# EAGLE board 14062-gatorBytes_Sensor_board-Panel (EAGLE 9.0.1)
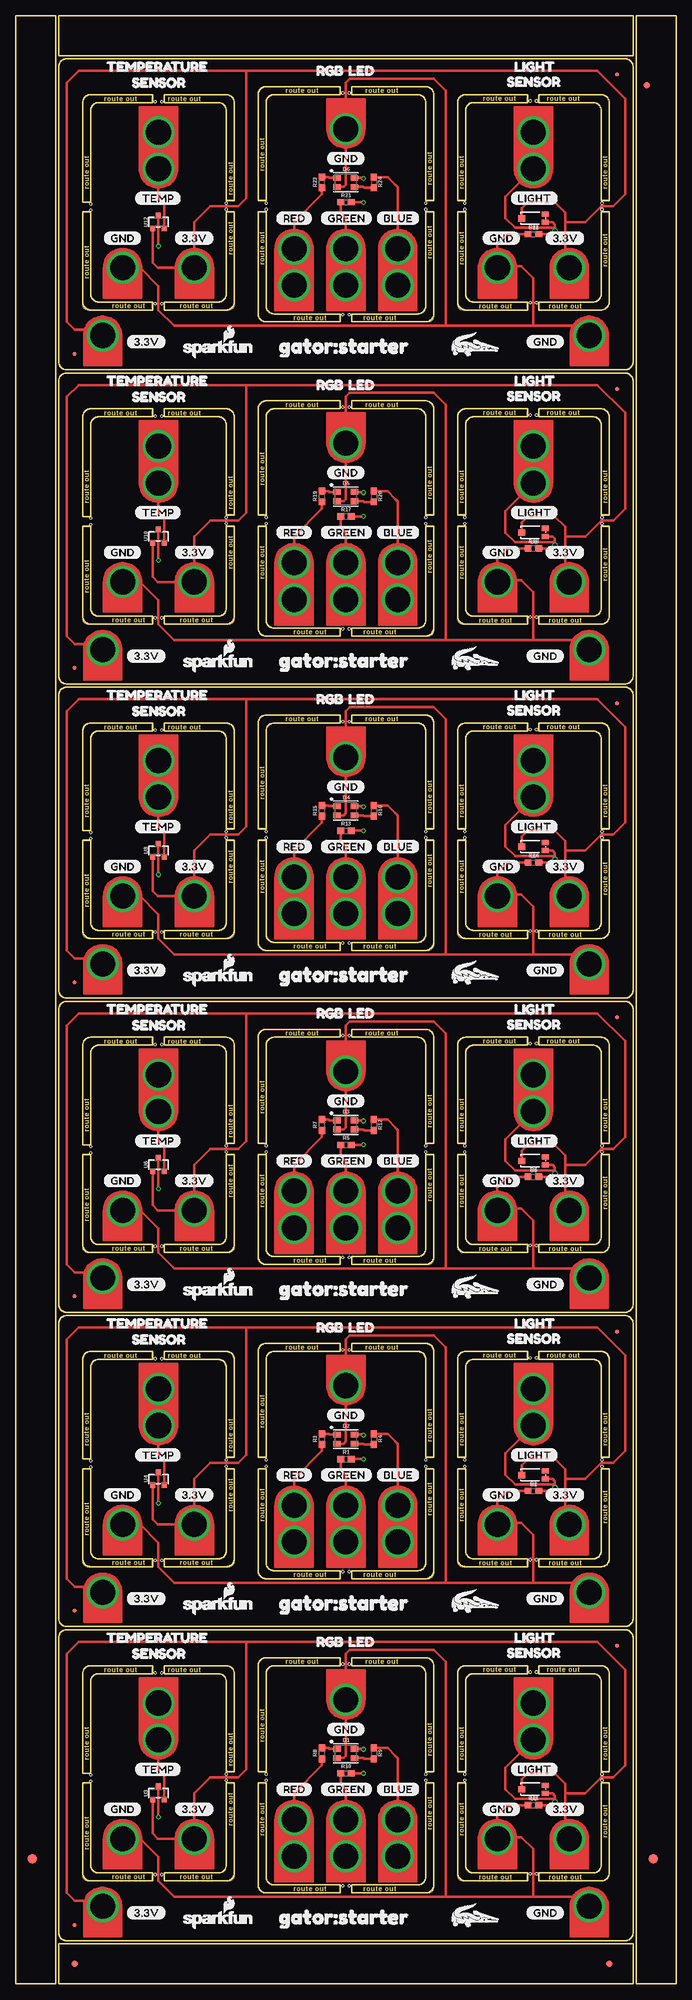
[diagram p0: board, top side]
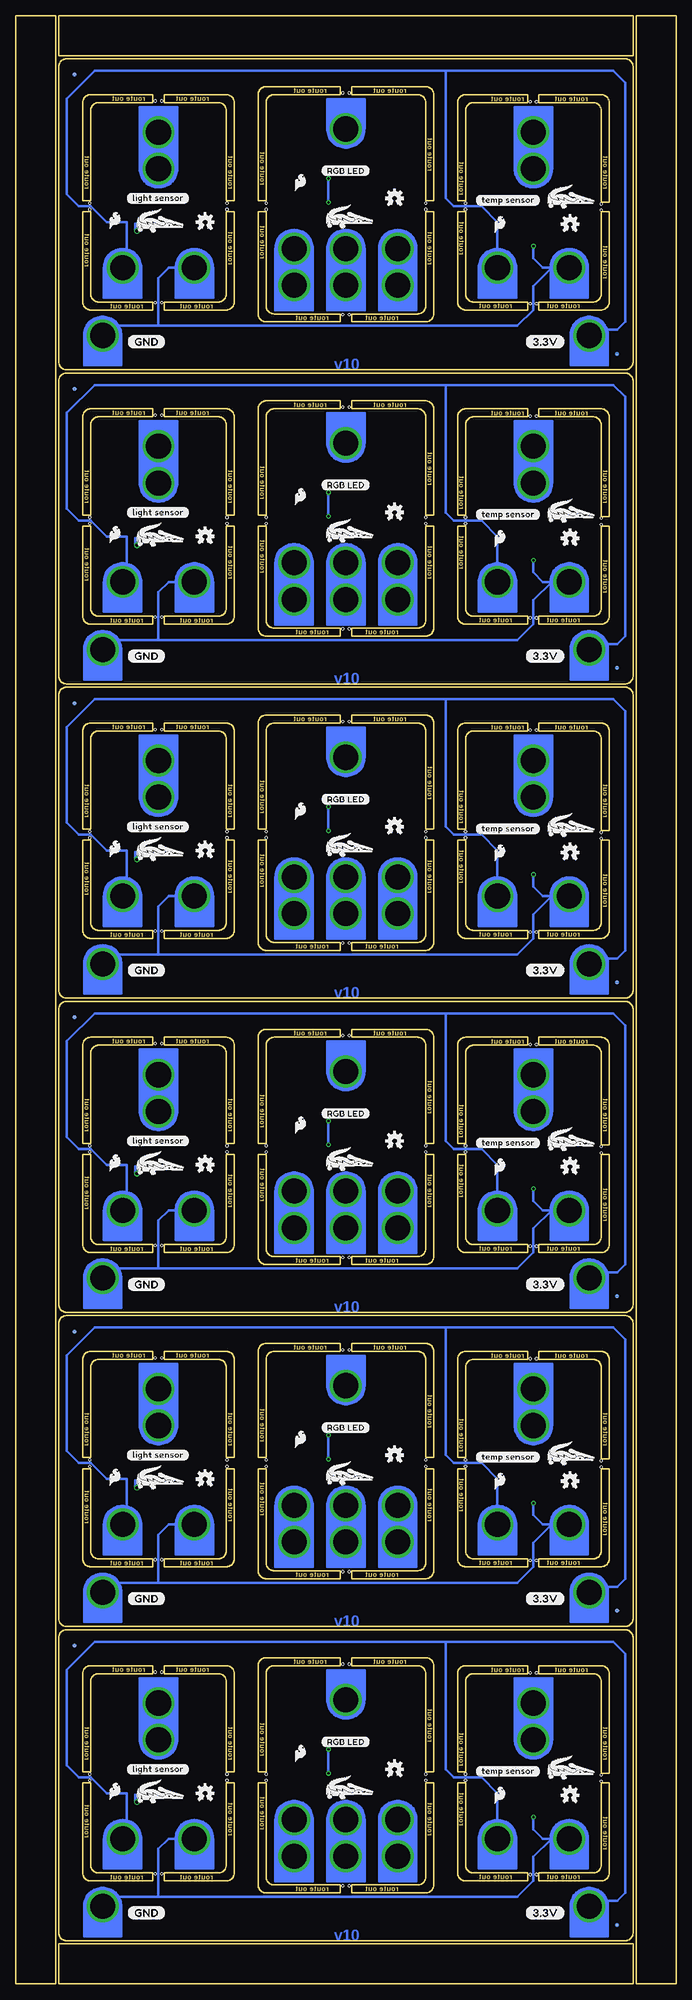
[diagram p1: board, bottom side, seen from below]

Size 105.16 x 313.44 mm. Coordinates in mm from the lower left corner, seen from the top.
Outline: 648 segments
Copper layers (1*16): Top 0.035mm / dielectric 1.5mm / Bottom 0.035mm
Design rules "SparkFun-2-layer-TIGHT": minimum track width 7mil, minimum drill 15mil, track to track 7mil, track to pad 7mil, pad to pad 7mil, via to via 7mil, smd to smd 7mil, copper to edge 7mil, drill to drill 7mil, minimum pad ring 7mil, minimum via ring 7mil, stop-mask expansion 4mil, vias tented up to drill 25mil, thermal gap 10mil
Holes 0.38 mm at 11.94,33.27 11.94,32.26 33.53,33.4 33.53,32.38 39.88,33.4 39.88,32.38 22.23,49.53 23.24,49.53 22.23,17.4 23.24,17.4 52.07,50.93 53.09,50.93 65.28,32.38 65.28,33.4 52.07,15.62 53.09,15.62 81.92,17.53 82.93,17.53 71.5,32.38 71.5,33.4 81.92,49.66 82.93,49.66 93.34,33.4 93.34,32.38 11.94,83.31 11.94,82.3 33.53,83.44 33.53,82.42 39.88,83.44 39.88,82.42 22.23,99.57 23.24,99.57 22.23,67.44 23.24,67.44 52.07,100.97 53.09,100.97 65.28,82.42 65.28,83.44 52.07,65.66 53.09,65.66 81.92,67.56 82.93,67.56 71.5,82.42 71.5,83.44 81.92,99.7 82.93,99.7 93.34,83.44 93.34,82.42 11.94,133.35 11.94,132.33 33.53,133.48 33.53,132.46 39.88,133.48 39.88,132.46 22.23,149.61 23.24,149.61 22.23,117.48 23.24,117.48 52.07,151 53.09,151 65.28,132.46 65.28,133.48 52.07,115.7 53.09,115.7 81.92,117.6 82.93,117.6 71.5,132.46 71.5,133.48 81.92,149.73 82.93,149.73 93.34,133.48 93.34,132.46 11.94,183.39 11.94,182.37 33.53,183.52 33.53,182.5 39.88,183.52 39.88,182.5 22.23,199.64 23.24,199.64 22.23,167.51 23.24,167.51 52.07,201.04 53.09,201.04 65.28,182.5 65.28,183.52 52.07,165.74 53.09,165.74 81.92,167.64 82.93,167.64 71.5,182.5 71.5,183.52 81.92,199.77 82.93,199.77 93.34,183.52 93.34,182.5 11.94,233.43 11.94,232.41 33.53,233.55 33.53,232.54 39.88,233.55 39.88,232.54 22.23,249.68 23.24,249.68 22.23,217.55 23.24,217.55 52.07,251.08 53.09,251.08 65.28,232.54 65.28,233.55 52.07,215.77 53.09,215.77 81.92,217.68 82.93,217.68 71.5,232.54 71.5,233.55 81.92,249.81 82.93,249.81 93.34,233.55 93.34,232.54 11.94,283.46 11.94,282.45 33.53,283.59 33.53,282.57 39.88,283.59 39.88,282.57 22.23,299.72 23.24,299.72 22.23,267.59 23.24,267.59 52.07,301.12 53.09,301.12 65.28,282.57 65.28,283.59 52.07,265.81 53.09,265.81 81.92,267.72 82.93,267.72 71.5,282.57 71.5,283.59 81.92,299.85 82.93,299.85 93.34,283.59 93.34,282.57

## Footprints (pad centres in the part's own frame; a part is rotated, then mirrored left to right if it is on the bottom)
PLCC4SMDLED = smd 1.2 x 0.9: 1 -1.4,0.725; 2 1.4,0.725; 3 1.4,-0.725; 4 -1.4,-0.725
FIDUCIAL-1X2 = smd 1 x 1: 1 0,0
FIDUCIAL-1.5X3 = smd 1.5 x 1.5: 1 0,0
FIDUCIAL-MICRO = smd 0.635 x 0.635: 1 0,0
0603 = smd 1.1 x 1: 1 -0.85,0; 2 0.85,0
TEMT6000 = smd 1.1 x 0.8: BASE -1.87,-0.65; EMITTER -1.87,0.65 | smd 1.1 x 1: COLLECTOR 1.86,0.01
SOT23-3 = smd 0.8 x 0.9: 1 -0.95,-1; 2 0.95,-1; 3 0,1.1
GATOR = drill 4 pad 5.08: P$1 0,-6.096; P$2 0,-0.254
TAB_GATOR_MINI = drill 4 pad 5.08: P1 0,4.826

## Placement (x,y rotation side)
D1  XZM2CRKM2DGFBB45SCCB  [PLCC4SMDLED]  52.58,36.7 0 top
D2  XZM2CRKM2DGFBB45SCCB  [PLCC4SMDLED]  52.58,86.74 0 top
D3  XZM2CRKM2DGFBB45SCCB  [PLCC4SMDLED]  52.58,136.78 0 top
D4  XZM2CRKM2DGFBB45SCCB  [PLCC4SMDLED]  52.58,186.82 0 top
D5  XZM2CRKM2DGFBB45SCCB  [PLCC4SMDLED]  52.58,236.86 0 top
D6  XZM2CRKM2DGFBB45SCCB  [PLCC4SMDLED]  52.58,286.89 0 top
E$1  [FIDUCIAL-1X2]  100.46,302.39 90 top
E$3  [FIDUCIAL-1.5X3]  2.67,19.88 180 top
E$4  [FIDUCIAL-1.5X3]  101.47,19.88 180 top
E$5  [FIDUCIAL-1X2]  94.49,3.17 90 top
E$6  [FIDUCIAL-1X2]  9.4,3.17 270 top
FD1  FIDUCIALUFIDUCIAL  [FIDUCIAL-MICRO]  95.76,53.85 0 top
FD2  FIDUCIALUFIDUCIAL  [FIDUCIAL-MICRO]  95.76,53.85 0 bottom
FD3  FIDUCIALUFIDUCIAL  [FIDUCIAL-MICRO]  9.4,9.4 0 bottom
FD4  FIDUCIALUFIDUCIAL  [FIDUCIAL-MICRO]  9.4,9.4 0 top
FD5  FIDUCIALUFIDUCIAL  [FIDUCIAL-MICRO]  95.76,103.89 0 top
FD6  FIDUCIALUFIDUCIAL  [FIDUCIAL-MICRO]  95.76,103.89 0 bottom
FD7  FIDUCIALUFIDUCIAL  [FIDUCIAL-MICRO]  9.4,59.44 0 bottom
FD8  FIDUCIALUFIDUCIAL  [FIDUCIAL-MICRO]  9.4,59.44 0 top
FD9  FIDUCIALUFIDUCIAL  [FIDUCIAL-MICRO]  95.76,153.92 0 top
FD10  FIDUCIALUFIDUCIAL  [FIDUCIAL-MICRO]  95.76,153.92 0 bottom
FD11  FIDUCIALUFIDUCIAL  [FIDUCIAL-MICRO]  9.4,109.47 0 bottom
FD12  FIDUCIALUFIDUCIAL  [FIDUCIAL-MICRO]  9.4,109.47 0 top
FD13  FIDUCIALUFIDUCIAL  [FIDUCIAL-MICRO]  95.76,203.96 0 top
FD14  FIDUCIALUFIDUCIAL  [FIDUCIAL-MICRO]  95.76,203.96 0 bottom
FD15  FIDUCIALUFIDUCIAL  [FIDUCIAL-MICRO]  9.4,159.51 0 bottom
FD16  FIDUCIALUFIDUCIAL  [FIDUCIAL-MICRO]  9.4,159.51 0 top
FD17  FIDUCIALUFIDUCIAL  [FIDUCIAL-MICRO]  95.76,254 0 top
FD18  FIDUCIALUFIDUCIAL  [FIDUCIAL-MICRO]  95.76,254 0 bottom
FD19  FIDUCIALUFIDUCIAL  [FIDUCIAL-MICRO]  9.4,209.55 0 bottom
FD20  FIDUCIALUFIDUCIAL  [FIDUCIAL-MICRO]  9.4,209.55 0 top
FD21  FIDUCIALUFIDUCIAL  [FIDUCIAL-MICRO]  95.76,304.04 0 top
FD22  FIDUCIALUFIDUCIAL  [FIDUCIAL-MICRO]  95.76,304.04 0 bottom
FD23  FIDUCIALUFIDUCIAL  [FIDUCIAL-MICRO]  9.4,259.59 0 bottom
FD24  FIDUCIALUFIDUCIAL  [FIDUCIAL-MICRO]  9.4,259.59 0 top
LOGO1  SFE_LOGO_FLAME.1_INCH  [SFE_LOGO_FLAME_.1]  90.49,29.02 0 bottom
LOGO2  OSHW-LOGOS  [OSHW-LOGO-S]  74.99,30.35 0 bottom
LOGO3  OSHW-LOGOS  [OSHW-LOGO-S]  44.83,34.16 0 bottom
LOGO4  SFE_LOGO_FLAME.1_INCH  [SFE_LOGO_FLAME_.1]  60.96,35.05 0 bottom
LOGO5  OSHW-LOGOS  [OSHW-LOGO-S]  16.89,30.04 0 bottom
LOGO6  SFE_LOGO_FLAME.1_INCH  [SFE_LOGO_FLAME_.1]  29.21,28.38 0 bottom
LOGO7  SFE_LOGO_FLAME.1_INCH  [SFE_LOGO_FLAME_.1]  90.49,79.06 0 bottom
LOGO8  OSHW-LOGOS  [OSHW-LOGO-S]  74.99,80.39 0 bottom
LOGO9  OSHW-LOGOS  [OSHW-LOGO-S]  44.83,84.2 0 bottom
LOGO10  SFE_LOGO_FLAME.1_INCH  [SFE_LOGO_FLAME_.1]  60.96,85.09 0 bottom
LOGO11  OSHW-LOGOS  [OSHW-LOGO-S]  16.89,80.07 0 bottom
LOGO12  SFE_LOGO_FLAME.1_INCH  [SFE_LOGO_FLAME_.1]  29.21,78.42 0 bottom
LOGO13  SFE_LOGO_FLAME.1_INCH  [SFE_LOGO_FLAME_.1]  90.49,129.1 0 bottom
LOGO14  OSHW-LOGOS  [OSHW-LOGO-S]  74.99,130.43 0 bottom
LOGO15  OSHW-LOGOS  [OSHW-LOGO-S]  44.83,134.24 0 bottom
LOGO16  SFE_LOGO_FLAME.1_INCH  [SFE_LOGO_FLAME_.1]  60.96,135.13 0 bottom
LOGO17  OSHW-LOGOS  [OSHW-LOGO-S]  16.89,130.11 0 bottom
LOGO18  SFE_LOGO_FLAME.1_INCH  [SFE_LOGO_FLAME_.1]  29.21,128.46 0 bottom
LOGO19  SFE_LOGO_FLAME.1_INCH  [SFE_LOGO_FLAME_.1]  90.49,179.13 0 bottom
LOGO20  OSHW-LOGOS  [OSHW-LOGO-S]  74.99,180.47 0 bottom
LOGO21  OSHW-LOGOS  [OSHW-LOGO-S]  44.83,184.28 0 bottom
LOGO22  SFE_LOGO_FLAME.1_INCH  [SFE_LOGO_FLAME_.1]  60.96,185.17 0 bottom
LOGO23  OSHW-LOGOS  [OSHW-LOGO-S]  16.89,180.15 0 bottom
LOGO24  SFE_LOGO_FLAME.1_INCH  [SFE_LOGO_FLAME_.1]  29.21,178.5 0 bottom
LOGO25  SFE_LOGO_FLAME.1_INCH  [SFE_LOGO_FLAME_.1]  90.49,229.17 0 bottom
LOGO26  OSHW-LOGOS  [OSHW-LOGO-S]  74.99,230.5 0 bottom
LOGO27  OSHW-LOGOS  [OSHW-LOGO-S]  44.83,234.31 0 bottom
LOGO28  SFE_LOGO_FLAME.1_INCH  [SFE_LOGO_FLAME_.1]  60.96,235.2 0 bottom
LOGO29  OSHW-LOGOS  [OSHW-LOGO-S]  16.89,230.19 0 bottom
LOGO30  SFE_LOGO_FLAME.1_INCH  [SFE_LOGO_FLAME_.1]  29.21,228.54 0 bottom
LOGO31  SFE_LOGO_FLAME.1_INCH  [SFE_LOGO_FLAME_.1]  90.49,279.21 0 bottom
LOGO32  OSHW-LOGOS  [OSHW-LOGO-S]  74.99,280.54 0 bottom
LOGO33  OSHW-LOGOS  [OSHW-LOGO-S]  44.83,284.35 0 bottom
LOGO34  SFE_LOGO_FLAME.1_INCH  [SFE_LOGO_FLAME_.1]  60.96,285.24 0 bottom
LOGO35  OSHW-LOGOS  [OSHW-LOGO-S]  16.89,280.23 0 bottom
LOGO36  SFE_LOGO_FLAME.1_INCH  [SFE_LOGO_FLAME_.1]  29.21,278.57 0 bottom
R1  100  [0603]  52.58,83.57 0 top
R2  10k  [0603]  82.42,78.49 0 top
R3  200  [0603]  48.77,86.74 90 top
R4  100  [0603]  57.02,86.74 270 top
R5  100  [0603]  52.58,133.6 0 top
R6  10k  [0603]  82.42,128.52 0 top
R7  200  [0603]  48.77,136.78 90 top
R8  200  [0603]  48.77,36.7 90 top
R9  100  [0603]  57.02,36.7 270 top
R10  100  [0603]  52.58,33.53 0 top
R11  10k  [0603]  82.42,28.45 0 top
R12  100  [0603]  57.02,136.78 270 top
R13  100  [0603]  52.58,183.64 0 top
R14  10k  [0603]  82.42,178.56 0 top
R15  200  [0603]  48.77,186.82 90 top
R16  100  [0603]  57.02,186.82 270 top
R17  100  [0603]  52.58,233.68 0 top
R18  10k  [0603]  82.42,228.6 0 top
R19  200  [0603]  48.77,236.86 90 top
R20  100  [0603]  57.02,236.86 270 top
R21  100  [0603]  52.58,283.72 0 top
R22  10k  [0603]  82.42,278.64 0 top
R23  200  [0603]  48.77,286.89 90 top
R24  100  [0603]  57.02,286.89 270 top
U1  LIGHT_SENSORTEMT6000  [TEMT6000]  82.42,81.03 180 top
U2  LIGHT_SENSORTEMT6000  [TEMT6000]  82.42,30.99 180 top
U3  MCP9700TT  [SOT23-3]  22.73,30.35 0 top
U4  MCP9700TT  [SOT23-3]  22.73,80.39 0 top
U5  LIGHT_SENSORTEMT6000  [TEMT6000]  82.42,131.06 180 top
U6  MCP9700TT  [SOT23-3]  22.73,130.43 0 top
U7  LIGHT_SENSORTEMT6000  [TEMT6000]  82.42,181.1 180 top
U8  MCP9700TT  [SOT23-3]  22.73,180.47 0 top
U9  LIGHT_SENSORTEMT6000  [TEMT6000]  82.42,231.14 180 top
U10  MCP9700TT  [SOT23-3]  22.73,230.5 0 top
U11  LIGHT_SENSORTEMT6000  [TEMT6000]  82.42,281.18 180 top
U12  MCP9700TT  [SOT23-3]  22.73,280.54 0 top
U$1  [GND0]  49.53,40.51 0 top
U$2  [3#3V1]  84.33,27.81 0 top
U$3  [3#3V1]  25.27,27.81 0 top
U$4  [BLUE10]  57.4,30.99 0 top
U$5  [SFE_LOGO_NAME_FLAME_.1]  26.29,8.64 0 top
U$6  [GND0]  13.97,27.81 0 top
U$7  [GND0]  74.3,27.81 0 top
U$8  [GREEN9]  48.51,30.99 0 top
U$9  [LIGHT4]  78.74,34.16 0 top
U$10  GATOR  [GATOR]  44.32,26.42 0 top
U$11  TAB_GATOR_MINI  [TAB_GATOR_MINI]  28.45,18.29 0 top
U$12  TAB_GATOR_MINI  [TAB_GATOR_MINI]  52.58,50.04 180 top
U$13  [TEMP3]  18.92,34.16 0 top
U$14  GATOR  [GATOR]  60.83,26.42 0 top
U$15  GATOR  [GATOR]  52.58,26.42 0 top
U$16  [SENSOR2]  17.14,52.58 0 top
U$17  [TEMPERATURE3]  13.08,55.12 0 top
U$18  [RED8]  41.4,30.99 0 top
U$19  TAB_GATOR_MINI  [TAB_GATOR_MINI]  13.84,7.49 0 top
U$20  [LIGHT4]  77.98,55.12 0 top
U$21  [SENSOR2]  76.84,52.7 0 top
U$22  TAB_GATOR_MINI  [TAB_GATOR_MINI]  17.02,18.29 0 top
U$23  GATOR  [GATOR]  22.73,38.61 180 top
U$24  GATOR  [GATOR]  82.42,38.61 180 top
U$25  TAB_GATOR_MINI  [TAB_GATOR_MINI]  76.71,18.29 0 top
U$26  TAB_GATOR_MINI  [TAB_GATOR_MINI]  88.14,18.29 0 top
U$27  [LED5]  51.56,54.48 0 top
U$28  [GATOR#PNG]  52.32,31.37 0 bottom
U$29  [GATOR#PNG]  82.49,30.73 0 bottom
U$30  [GATOR#STARTER0]  39.88,10.67 0 top
U$31  [LIGHT_SENSOR0]  87.5,34.16 0 bottom
U$32  [TEMP_SENSOR3]  31.94,33.85 0 bottom
U$33  GATOR  [GATOR]  44.32,76.45 0 top
U$34  [RGB_LED0]  56.51,38.54 0 bottom
U$35  TAB_GATOR_MINI  [TAB_GATOR_MINI]  91.31,7.49 0 top
U$36  [3#3V1]  17.65,11.3 0 top
U$37  [3#3V1]  24,11.3 0 bottom
U$38  [GND0]  81.28,11.3 0 top
U$39  [GND0]  87.38,11.3 0 bottom
U$40  [RGB0]  46.48,54.48 0 top
U$41  [GATOR#PNG]  72.83,11.05 0 top
U$42  TAB_GATOR_MINI  [TAB_GATOR_MINI]  28.45,68.33 0 top
U$43  TAB_GATOR_MINI  [TAB_GATOR_MINI]  52.58,100.08 180 top
U$44  GATOR  [GATOR]  60.83,76.45 0 top
U$45  GATOR  [GATOR]  52.58,76.45 0 top
U$46  TAB_GATOR_MINI  [TAB_GATOR_MINI]  17.02,68.33 0 top
U$47  GATOR  [GATOR]  22.73,88.65 180 top
U$48  GATOR  [GATOR]  82.42,88.65 180 top
U$49  TAB_GATOR_MINI  [TAB_GATOR_MINI]  76.71,68.33 0 top
U$50  TAB_GATOR_MINI  [TAB_GATOR_MINI]  88.14,68.33 0 top
U$51  [3#3V1]  84.33,77.85 0 top
U$52  [3#3V1]  25.27,77.85 0 top
U$53  [BLUE10]  57.4,81.03 0 top
U$54  [GND0]  13.97,77.85 0 top
U$55  [GND0]  74.3,77.85 0 top
U$56  [GREEN9]  48.51,81.03 0 top
U$57  [LIGHT4]  78.74,84.2 0 top
U$58  [TEMP3]  18.92,84.2 0 top
U$59  [RED8]  41.4,81.03 0 top
U$60  [TEMPERATURE3]  13.08,105.16 0 top
U$61  [SENSOR2]  17.14,102.62 0 top
U$62  [LIGHT4]  77.98,105.16 0 top
U$63  [SENSOR2]  76.84,102.74 0 top
U$64  [LED5]  51.56,104.52 0 top
U$65  [GATOR#PNG]  17.08,84.58 0 bottom
U$66  [GATOR#PNG]  52.32,81.41 0 bottom
U$67  [GATOR#PNG]  82.49,80.77 0 bottom
U$68  [LIGHT_SENSOR0]  87.5,84.2 0 bottom
U$69  [TEMP_SENSOR3]  31.94,83.88 0 bottom
U$70  [GATOR#PNG]  17.08,34.54 0 bottom
U$71  [RGB_LED0]  56.51,88.58 0 bottom
U$72  [SFE_LOGO_NAME_FLAME_.1]  26.29,58.67 0 top
U$73  TAB_GATOR_MINI  [TAB_GATOR_MINI]  13.84,57.53 0 top
U$74  TAB_GATOR_MINI  [TAB_GATOR_MINI]  91.31,57.53 0 top
U$75  [3#3V1]  17.65,61.34 0 top
U$76  [3#3V1]  24,61.34 0 bottom
U$77  [GND0]  81.28,61.34 0 top
U$78  [GND0]  87.38,61.34 0 bottom
U$79  [RGB0]  46.48,104.52 0 top
U$80  [GATOR#PNG]  72.83,61.09 0 top
U$81  [GATOR#STARTER0]  39.88,60.71 0 top
U$82  [GND0]  49.53,90.55 0 top
U$83  GATOR  [GATOR]  44.32,126.49 0 top
U$84  TAB_GATOR_MINI  [TAB_GATOR_MINI]  28.45,118.36 0 top
U$85  TAB_GATOR_MINI  [TAB_GATOR_MINI]  52.58,150.11 180 top
U$86  GATOR  [GATOR]  60.83,126.49 0 top
U$87  GATOR  [GATOR]  52.58,126.49 0 top
U$88  TAB_GATOR_MINI  [TAB_GATOR_MINI]  17.02,118.36 0 top
U$89  GATOR  [GATOR]  22.73,138.68 180 top
U$90  GATOR  [GATOR]  82.42,138.68 180 top
U$91  TAB_GATOR_MINI  [TAB_GATOR_MINI]  76.71,118.36 0 top
U$92  TAB_GATOR_MINI  [TAB_GATOR_MINI]  88.14,118.36 0 top
U$93  [3#3V1]  84.33,127.89 0 top
U$94  [3#3V1]  25.27,127.89 0 top
U$95  [BLUE10]  57.4,131.06 0 top
U$96  [GND0]  13.97,127.89 0 top
U$97  [GND0]  74.3,127.89 0 top
U$98  [GREEN9]  48.51,131.06 0 top
U$99  [LIGHT4]  78.74,134.24 0 top
U$100  [TEMP3]  18.92,134.24 0 top
U$101  [RED8]  41.4,131.06 0 top
U$102  [TEMPERATURE3]  13.08,155.19 0 top
U$103  [SENSOR2]  17.14,152.65 0 top
U$104  [LIGHT4]  77.98,155.19 0 top
U$105  [SENSOR2]  76.84,152.78 0 top
U$106  [LED5]  51.56,154.56 0 top
U$107  [GATOR#PNG]  17.08,134.62 0 bottom
U$108  [GATOR#PNG]  52.32,131.44 0 bottom
U$109  [GATOR#PNG]  82.49,130.81 0 bottom
U$110  [LIGHT_SENSOR0]  87.5,134.24 0 bottom
U$111  [TEMP_SENSOR3]  31.94,133.92 0 bottom
U$112  [RGB_LED0]  56.51,138.62 0 bottom
U$113  [SFE_LOGO_NAME_FLAME_.1]  26.29,108.71 0 top
U$114  TAB_GATOR_MINI  [TAB_GATOR_MINI]  13.84,107.57 0 top
U$115  TAB_GATOR_MINI  [TAB_GATOR_MINI]  91.31,107.57 0 top
U$116  [3#3V1]  17.65,111.38 0 top
U$117  [3#3V1]  24,111.38 0 bottom
U$118  [GND0]  81.28,111.38 0 top
U$119  [GND0]  87.38,111.38 0 bottom
U$120  [RGB0]  46.48,154.56 0 top
U$121  [GATOR#PNG]  72.83,111.12 0 top
U$122  [GATOR#STARTER0]  39.88,110.74 0 top
U$123  [GND0]  49.53,140.59 0 top
U$124  GATOR  [GATOR]  44.32,176.53 0 top
U$125  TAB_GATOR_MINI  [TAB_GATOR_MINI]  28.45,168.4 0 top
U$126  TAB_GATOR_MINI  [TAB_GATOR_MINI]  52.58,200.15 180 top
U$127  GATOR  [GATOR]  60.83,176.53 0 top
U$128  GATOR  [GATOR]  52.58,176.53 0 top
U$129  TAB_GATOR_MINI  [TAB_GATOR_MINI]  17.02,168.4 0 top
U$130  GATOR  [GATOR]  22.73,188.72 180 top
U$131  GATOR  [GATOR]  82.42,188.72 180 top
U$132  TAB_GATOR_MINI  [TAB_GATOR_MINI]  76.71,168.4 0 top
U$133  TAB_GATOR_MINI  [TAB_GATOR_MINI]  88.14,168.4 0 top
U$134  [3#3V1]  84.33,177.93 0 top
U$135  [3#3V1]  25.27,177.93 0 top
U$136  [BLUE10]  57.4,181.1 0 top
U$137  [GND0]  13.97,177.93 0 top
U$138  [GND0]  74.3,177.93 0 top
U$139  [GREEN9]  48.51,181.1 0 top
U$140  [LIGHT4]  78.74,184.28 0 top
U$141  [TEMP3]  18.92,184.28 0 top
U$142  [RED8]  41.4,181.1 0 top
U$143  [TEMPERATURE3]  13.08,205.23 0 top
U$144  [SENSOR2]  17.14,202.69 0 top
U$145  [LIGHT4]  77.98,205.23 0 top
U$146  [SENSOR2]  76.84,202.82 0 top
U$147  [LED5]  51.56,204.6 0 top
U$148  [GATOR#PNG]  17.08,184.66 0 bottom
U$149  [GATOR#PNG]  52.32,181.48 0 bottom
U$150  [GATOR#PNG]  82.49,180.85 0 bottom
U$151  [LIGHT_SENSOR0]  87.5,184.28 0 bottom
U$152  [TEMP_SENSOR3]  31.94,183.96 0 bottom
U$153  [RGB_LED0]  56.51,188.66 0 bottom
U$154  [SFE_LOGO_NAME_FLAME_.1]  26.29,158.75 0 top
U$155  TAB_GATOR_MINI  [TAB_GATOR_MINI]  13.84,157.61 0 top
U$156  TAB_GATOR_MINI  [TAB_GATOR_MINI]  91.31,157.61 0 top
U$157  [3#3V1]  17.65,161.42 0 top
U$158  [3#3V1]  24,161.42 0 bottom
U$159  [GND0]  81.28,161.42 0 top
U$160  [GND0]  87.38,161.42 0 bottom
U$161  [RGB0]  46.48,204.6 0 top
U$162  [GATOR#PNG]  72.83,161.16 0 top
U$163  [GATOR#STARTER0]  39.88,160.78 0 top
U$164  [GND0]  49.53,190.63 0 top
U$165  GATOR  [GATOR]  44.32,226.57 0 top
U$166  TAB_GATOR_MINI  [TAB_GATOR_MINI]  28.45,218.44 0 top
U$167  TAB_GATOR_MINI  [TAB_GATOR_MINI]  52.58,250.19 180 top
U$168  GATOR  [GATOR]  60.83,226.57 0 top
U$169  GATOR  [GATOR]  52.58,226.57 0 top
U$170  TAB_GATOR_MINI  [TAB_GATOR_MINI]  17.02,218.44 0 top
U$171  GATOR  [GATOR]  22.73,238.76 180 top
U$172  GATOR  [GATOR]  82.42,238.76 180 top
U$173  TAB_GATOR_MINI  [TAB_GATOR_MINI]  76.71,218.44 0 top
U$174  TAB_GATOR_MINI  [TAB_GATOR_MINI]  88.14,218.44 0 top
U$175  [3#3V1]  84.33,227.97 0 top
U$176  [3#3V1]  25.27,227.97 0 top
U$177  [BLUE10]  57.4,231.14 0 top
U$178  [GND0]  13.97,227.97 0 top
U$179  [GND0]  74.3,227.97 0 top
U$180  [GREEN9]  48.51,231.14 0 top
U$181  [LIGHT4]  78.74,234.31 0 top
U$182  [TEMP3]  18.92,234.31 0 top
U$183  [RED8]  41.4,231.14 0 top
U$184  [TEMPERATURE3]  13.08,255.27 0 top
U$185  [SENSOR2]  17.14,252.73 0 top
U$186  [LIGHT4]  77.98,255.27 0 top
U$187  [SENSOR2]  76.84,252.86 0 top
U$188  [LED5]  51.56,254.63 0 top
U$189  [GATOR#PNG]  17.08,234.7 0 bottom
U$190  [GATOR#PNG]  52.32,231.52 0 bottom
U$191  [GATOR#PNG]  82.49,230.89 0 bottom
U$192  [LIGHT_SENSOR0]  87.5,234.31 0 bottom
U$193  [TEMP_SENSOR3]  31.94,234 0 bottom
U$194  [RGB_LED0]  56.51,238.7 0 bottom
U$195  [SFE_LOGO_NAME_FLAME_.1]  26.29,208.79 0 top
U$196  TAB_GATOR_MINI  [TAB_GATOR_MINI]  13.84,207.65 0 top
U$197  TAB_GATOR_MINI  [TAB_GATOR_MINI]  91.31,207.65 0 top
U$198  [3#3V1]  17.65,211.46 0 top
U$199  [3#3V1]  24,211.46 0 bottom
U$200  [GND0]  81.28,211.46 0 top
U$201  [GND0]  87.38,211.46 0 bottom
U$202  [RGB0]  46.48,254.63 0 top
U$203  [GATOR#PNG]  72.83,211.2 0 top
U$204  [GATOR#STARTER0]  39.88,210.82 0 top
U$205  [GND0]  49.53,240.66 0 top
U$206  GATOR  [GATOR]  44.32,276.61 0 top
U$207  TAB_GATOR_MINI  [TAB_GATOR_MINI]  28.45,268.48 0 top
U$208  TAB_GATOR_MINI  [TAB_GATOR_MINI]  52.58,300.23 180 top
U$209  GATOR  [GATOR]  60.83,276.61 0 top
U$210  GATOR  [GATOR]  52.58,276.61 0 top
U$211  TAB_GATOR_MINI  [TAB_GATOR_MINI]  17.02,268.48 0 top
U$212  GATOR  [GATOR]  22.73,288.8 180 top
U$213  GATOR  [GATOR]  82.42,288.8 180 top
U$214  TAB_GATOR_MINI  [TAB_GATOR_MINI]  76.71,268.48 0 top
U$215  TAB_GATOR_MINI  [TAB_GATOR_MINI]  88.14,268.48 0 top
U$216  [3#3V1]  84.33,278 0 top
U$217  [3#3V1]  25.27,278 0 top
U$218  [BLUE10]  57.4,281.18 0 top
U$219  [GND0]  13.97,278 0 top
U$220  [GND0]  74.3,278 0 top
U$221  [GREEN9]  48.51,281.18 0 top
U$222  [LIGHT4]  78.74,284.35 0 top
U$223  [TEMP3]  18.92,284.35 0 top
U$224  [RED8]  41.4,281.18 0 top
U$225  [TEMPERATURE3]  13.08,305.31 0 top
U$226  [SENSOR2]  17.14,302.77 0 top
U$227  [LIGHT4]  77.98,305.31 0 top
U$228  [SENSOR2]  76.84,302.89 0 top
U$229  [LED5]  51.56,304.67 0 top
U$230  [GATOR#PNG]  17.08,284.73 0 bottom
U$231  [GATOR#PNG]  52.32,281.56 0 bottom
U$232  [GATOR#PNG]  82.49,280.92 0 bottom
U$233  [LIGHT_SENSOR0]  87.5,284.35 0 bottom
U$234  [TEMP_SENSOR3]  31.94,284.04 0 bottom
U$235  [RGB_LED0]  56.51,288.73 0 bottom
U$236  [SFE_LOGO_NAME_FLAME_.1]  26.29,258.83 0 top
U$237  TAB_GATOR_MINI  [TAB_GATOR_MINI]  13.84,257.68 0 top
U$238  TAB_GATOR_MINI  [TAB_GATOR_MINI]  91.31,257.68 0 top
U$239  [3#3V1]  17.65,261.49 0 top
U$240  [3#3V1]  24,261.49 0 bottom
U$241  [GND0]  81.28,261.49 0 top
U$242  [GND0]  87.38,261.49 0 bottom
U$243  [RGB0]  46.48,304.67 0 top
U$244  [GATOR#PNG]  72.83,261.24 0 top
U$245  [GATOR#STARTER0]  39.88,260.86 0 top
U$246  [GND0]  49.53,290.7 0 top

## Library data of the parts
D1-D6 = SparkFun-LED; PROD_ID: DIO-13722
E$1 E$5 E$6 FD1-FD24 LOGO1-LOGO36 U$5 U$72 U$113 U$154 U$195 U$236 = SparkFun-Aesthetics
E$3 E$4 = SparkFun-Retired
R1 R4 R5 R9 R10 R12 R13 R16 R17 R20 R21 R24 = SparkFun-Resistors; PROD_ID: RES-12438
R2 R6 R11 R14 R18 R22 = SparkFun-Resistors; PROD_ID: RES-00824
R3 R7 R8 R15 R19 R23 = SparkFun-Resistors; PROD_ID: RES-08220
U1 U2 U5 U7 U9 U11 = SparkFun-Sensors; PROD_ID: COMP-08569; SF_ID: COM-08348
U3 U4 U6 U8 U10 U12 = SparkFun-Sensors; PROD_ID: IC-08917
U$1-U$4 U$6-U$9 U$13 U$18 U$36-U$39 U$51-U$59 U$75-U$78 U$82 U$93-U$101 U$116-U$119 U$123 U$134-U$142 U$157-U$160 U$164 U$175-U$183 U$198-U$201 U$205 U$216-U$224 U$239-U$242 U$246 = 001
U$10-U$12 U$14 U$15 U$19 U$22-U$26 U$33 U$35 U$42-U$50 U$73 U$74 U$83-U$92 U$114 U$115 U$124-U$133 U$155 U$156 U$165-U$174 U$196 U$197 U$206-U$215 U$237 U$238 = SparkFun-Connectors
U$16 U$17 U$20 U$21 U$27 U$60-U$64 U$102-U$106 U$143-U$147 U$184-U$188 U$225-U$229 = 002
U$28 U$29 U$41 U$65-U$67 U$70 U$80 U$107-U$109 U$121 U$148-U$150 U$162 U$189-U$191 U$203 U$230-U$232 U$244 = gator#PNG (6)
U$30 U$81 U$122 U$163 U$204 U$245 = buzzard_labels (4)
U$31 U$32 U$68 U$69 U$110 U$111 U$151 U$152 U$192 U$193 U$233 U$234 = 003
U$34 U$40 U$71 U$79 U$112 U$120 U$153 U$161 U$194 U$202 U$235 U$243 = buzzard_labels (1)

## Nets
3.3V: U2.COLLECTOR U3.1 U$11.P1 U$19.P1 U$26.P1
3.3V1: U1.COLLECTOR U4.1 U$42.P1 U$50.P1 U$73.P1
3.3V2: U5.COLLECTOR U6.1 U$84.P1 U$92.P1 U$114.P1
3.3V3: U7.COLLECTOR U8.1 U$125.P1 U$133.P1 U$155.P1
3.3V4: U9.COLLECTOR U10.1 U$166.P1 U$174.P1 U$196.P1
3.3V5: U11.COLLECTOR U12.1 U$207.P1 U$215.P1 U$237.P1
GND: D1.4 R11.1 U3.3 U$12.P1 U$22.P1 U$25.P1 U$35.P1
GND1: D2.4 R2.1 U4.3 U$43.P1 U$46.P1 U$49.P1 U$74.P1
GND2: D3.4 R6.1 U6.3 U$85.P1 U$88.P1 U$91.P1 U$115.P1
GND3: D4.4 R14.1 U8.3 U$126.P1 U$129.P1 U$132.P1 U$156.P1
GND4: D5.4 R18.1 U10.3 U$167.P1 U$170.P1 U$173.P1 U$197.P1
GND5: D6.4 R22.1 U12.3 U$208.P1 U$211.P1 U$214.P1 U$238.P1
N$1: D2.3 R4.2
N$2: D2.1 R3.2
N$3: D2.2 R1.2
N$4: R3.1 U$33.P$1 U$33.P$2
N$5: R4.1 U$44.P$1 U$44.P$2
N$6: R1.1 U$45.P$1 U$45.P$2
N$7: U4.2 U$47.P$1 U$47.P$2
N$8: R2.2 U1.EMITTER U$48.P$1 U$48.P$2
N$9: D3.3 R12.2
N$10: U3.2 U$23.P$1 U$23.P$2
N$11: D1.3 R9.2
N$12: D1.1 R8.2
N$13: D1.2 R10.2
N$14: R8.1 U$10.P$1 U$10.P$2
N$15: R9.1 U$14.P$1 U$14.P$2
N$16: R10.1 U$15.P$1 U$15.P$2
N$17: D3.1 R7.2
N$18: R11.2 U2.EMITTER U$24.P$1 U$24.P$2
N$19: D3.2 R5.2
N$20: R7.1 U$83.P$1 U$83.P$2
N$21: R12.1 U$86.P$1 U$86.P$2
N$22: R5.1 U$87.P$1 U$87.P$2
N$23: U6.2 U$89.P$1 U$89.P$2
N$24: R6.2 U5.EMITTER U$90.P$1 U$90.P$2
N$25: D4.3 R16.2
N$26: D4.1 R15.2
N$27: D4.2 R13.2
N$28: R15.1 U$124.P$1 U$124.P$2
N$29: R16.1 U$127.P$1 U$127.P$2
N$30: R13.1 U$128.P$1 U$128.P$2
N$31: U8.2 U$130.P$1 U$130.P$2
N$32: R14.2 U7.EMITTER U$131.P$1 U$131.P$2
N$33: D5.3 R20.2
N$34: D5.1 R19.2
N$35: D5.2 R17.2
N$36: R19.1 U$165.P$1 U$165.P$2
N$37: R20.1 U$168.P$1 U$168.P$2
N$38: R17.1 U$169.P$1 U$169.P$2
N$39: U10.2 U$171.P$1 U$171.P$2
N$40: R18.2 U9.EMITTER U$172.P$1 U$172.P$2
N$41: D6.3 R24.2
N$42: D6.1 R23.2
N$43: D6.2 R21.2
N$44: R23.1 U$206.P$1 U$206.P$2
N$45: R24.1 U$209.P$1 U$209.P$2
N$46: R21.1 U$210.P$1 U$210.P$2
N$47: U12.2 U$212.P$1 U$212.P$2
N$48: R22.2 U11.EMITTER U$213.P$1 U$213.P$2

## Tracks (layer width: path | path; a pad name or v marks a point on that pad's centre or on a via)
3.3V
  Top 0.406: U2.COLLECTOR 80.56,32.56 81.53,33.53 85.85,33.53 87.5,31.88 87.5,30.35 | 53.21,54.48 53.85,54.48 | 90.68,30.35 87.5,30.35 | 87.5,30.35 87.5,23.75 | U3.1 21.78,23.94 22.61,23.11 U$11.P1 28.45,30.35 30.99,32.89 35.43,32.89 36.7,34.16 36.7,54.48 | 90.68,30.35 87.5,30.35 | U$19.P1 12.95,13.21 9.4,13.21 8.13,14.48 8.13,52.58 10.03,54.48 36.7,54.48 | 36.7,54.48 52.58,54.48 53.85,54.48 | 53.85,54.48 92.58,54.48 97.03,50.04 97.03,34.8 95.12,32.89 93.22,32.89 90.68,30.35 | 53.85,54.48
  Bottom 0.406: U$11.P1 28.45,30.35 30.99,32.89 35.43,32.89 36.7,34.16 36.7,54.48 | U$19.P1 13.84,12.57 13.21,13.21 9.4,13.21 8.13,14.48 8.13,52.58 10.03,54.48 36.7,54.48 | 36.7,54.48 92.58,54.48 97.03,50.04 97.03,34.8 95.12,32.89 93.22,32.89 90.68,30.35 87.5,30.35 87.5,23.75 U$26.P1
3.3V1
  Top 0.406: U1.COLLECTOR 80.56,82.59 81.53,83.57 85.85,83.57 87.5,81.92 87.5,80.39 | 53.21,104.52 53.85,104.52 | 90.68,80.39 87.5,80.39 | 87.5,80.39 87.5,73.79 | U4.1 21.78,73.98 22.61,73.15 U$42.P1 28.45,80.39 30.99,82.93 35.43,82.93 36.7,84.2 36.7,104.52 | 90.68,80.39 87.5,80.39 | U$73.P1 12.95,63.25 9.4,63.25 8.13,64.52 8.13,102.62 10.03,104.52 36.7,104.52 | 36.7,104.52 52.58,104.52 53.85,104.52 | 53.85,104.52 92.58,104.52 97.03,100.08 97.03,84.84 95.12,82.93 93.22,82.93 90.68,80.39 | 53.85,104.52
  Bottom 0.406: U$42.P1 28.45,80.39 30.99,82.93 35.43,82.93 36.7,84.2 36.7,104.52 | U$73.P1 13.84,62.61 13.21,63.25 9.4,63.25 8.13,64.52 8.13,102.62 10.03,104.52 36.7,104.52 | 36.7,104.52 92.58,104.52 97.03,100.08 97.03,84.84 95.12,82.93 93.22,82.93 90.68,80.39 87.5,80.39 87.5,73.79 U$50.P1
3.3V2
  Top 0.406: U5.COLLECTOR 80.56,132.63 81.53,133.6 85.85,133.6 87.5,131.95 87.5,130.43 | 53.21,154.56 53.85,154.56 | 90.68,130.43 87.5,130.43 | 87.5,130.43 87.5,123.83 | U6.1 21.78,124.01 22.61,123.19 U$84.P1 28.45,130.43 30.99,132.97 35.43,132.97 36.7,134.24 36.7,154.56 | 90.68,130.43 87.5,130.43 | U$114.P1 12.95,113.28 9.4,113.28 8.13,114.55 8.13,152.65 10.03,154.56 36.7,154.56 | 36.7,154.56 52.58,154.56 53.85,154.56 | 53.85,154.56 92.58,154.56 97.03,150.11 97.03,134.87 95.12,132.97 93.22,132.97 90.68,130.43 | 53.85,154.56
  Bottom 0.406: U$84.P1 28.45,130.43 30.99,132.97 35.43,132.97 36.7,134.24 36.7,154.56 | U$114.P1 13.84,112.65 13.21,113.28 9.4,113.28 8.13,114.55 8.13,152.65 10.03,154.56 36.7,154.56 | 36.7,154.56 92.58,154.56 97.03,150.11 97.03,134.87 95.12,132.97 93.22,132.97 90.68,130.43 87.5,130.43 87.5,123.83 U$92.P1
3.3V3
  Top 0.406: U7.COLLECTOR 80.56,182.67 81.53,183.64 85.85,183.64 87.5,181.99 87.5,180.47 | 53.21,204.6 53.85,204.6 | 90.68,180.47 87.5,180.47 | 87.5,180.47 87.5,173.86 | U8.1 21.78,174.05 22.61,173.23 U$125.P1 28.45,180.47 30.99,183.01 35.43,183.01 36.7,184.28 36.7,204.6 | 90.68,180.47 87.5,180.47 | U$155.P1 12.95,163.32 9.4,163.32 8.13,164.59 8.13,202.69 10.03,204.6 36.7,204.6 | 36.7,204.6 52.58,204.6 53.85,204.6 | 53.85,204.6 92.58,204.6 97.03,200.15 97.03,184.91 95.12,183.01 93.22,183.01 90.68,180.47 | 53.85,204.6
  Bottom 0.406: U$125.P1 28.45,180.47 30.99,183.01 35.43,183.01 36.7,184.28 36.7,204.6 | U$155.P1 13.84,162.69 13.21,163.32 9.4,163.32 8.13,164.59 8.13,202.69 10.03,204.6 36.7,204.6 | 36.7,204.6 92.58,204.6 97.03,200.15 97.03,184.91 95.12,183.01 93.22,183.01 90.68,180.47 87.5,180.47 87.5,173.86 U$133.P1
3.3V4
  Top 0.406: U9.COLLECTOR 80.56,232.71 81.53,233.68 85.85,233.68 87.5,232.03 87.5,230.5 | 53.21,254.63 53.85,254.63 | 90.68,230.5 87.5,230.5 | 87.5,230.5 87.5,223.9 | U10.1 21.78,224.09 22.61,223.27 U$166.P1 28.45,230.5 30.99,233.05 35.43,233.05 36.7,234.31 36.7,254.63 | 90.68,230.5 87.5,230.5 | U$196.P1 12.95,213.36 9.4,213.36 8.13,214.63 8.13,252.73 10.03,254.63 36.7,254.63 | 36.7,254.63 52.58,254.63 53.85,254.63 | 53.85,254.63 92.58,254.63 97.03,250.19 97.03,234.95 95.12,233.05 93.22,233.05 90.68,230.5 | 53.85,254.63
  Bottom 0.406: U$166.P1 28.45,230.5 30.99,233.05 35.43,233.05 36.7,234.31 36.7,254.63 | U$196.P1 13.84,212.72 13.21,213.36 9.4,213.36 8.13,214.63 8.13,252.73 10.03,254.63 36.7,254.63 | 36.7,254.63 92.58,254.63 97.03,250.19 97.03,234.95 95.12,233.05 93.22,233.05 90.68,230.5 87.5,230.5 87.5,223.9 U$174.P1
3.3V5
  Top 0.406: U11.COLLECTOR 80.56,282.75 81.53,283.72 85.85,283.72 87.5,282.07 87.5,280.54 | 53.21,304.67 53.85,304.67 | 90.68,280.54 87.5,280.54 | 87.5,280.54 87.5,273.94 | U12.1 21.78,274.13 22.61,273.3 U$207.P1 28.45,280.54 30.99,283.08 35.43,283.08 36.7,284.35 36.7,304.67 | 90.68,280.54 87.5,280.54 | U$237.P1 12.95,263.4 9.4,263.4 8.13,264.67 8.13,302.77 10.03,304.67 36.7,304.67 | 36.7,304.67 52.58,304.67 53.85,304.67 | 53.85,304.67 92.58,304.67 97.03,300.23 97.03,284.99 95.12,283.08 93.22,283.08 90.68,280.54 | 53.85,304.67
  Bottom 0.406: U$207.P1 28.45,280.54 30.99,283.08 35.43,283.08 36.7,284.35 36.7,304.67 | U$237.P1 13.84,262.76 13.21,263.4 9.4,263.4 8.13,264.67 8.13,302.77 10.03,304.67 36.7,304.67 | 36.7,304.67 92.58,304.67 97.03,300.23 97.03,284.99 95.12,283.08 93.22,283.08 90.68,280.54 87.5,280.54 87.5,273.94 U$215.P1
GND  (via drill 0.38)
  Top 0.406: 19.81,23.11 22.73,20.19 22.73,16.38 25.27,13.84 68.45,13.84 | 77.6,23.37 80.52,23.37 82.42,21.46 82.42,13.84 | R11.1 78.3,28.45 76.71,26.86 U$25.P1 | v22.73,26.54 U3.3 | U$35.P1 89.79,13.84 82.42,13.84 | 82.42,13.84 68.45,13.84 | D1.4 52.23,35.98 52.58,36.32 U$12.P1 | U$12.P1 52.58,48.77 | U$12.P1 52.58,52.58 53.21,53.21 66.55,53.21 68.45,51.31 68.45,13.84
  Bottom 0.406: 19.81,23.11 22.73,20.19 22.73,16.38 25.27,13.84 82.42,13.84 | U$25.P1 80.77,23.11 82.42,21.46 82.42,13.84 | v22.73,26.54 22.73,24.64 21.21,23.11 19.81,23.11 | 82.42,13.84 89.79,13.84 U$35.P1 | 19.81,23.11 U$22.P1
GND1  (via drill 0.38)
  Top 0.406: 19.81,73.15 22.73,70.23 22.73,66.42 25.27,63.88 68.45,63.88 | 77.6,73.41 80.52,73.41 82.42,71.5 82.42,63.88 | R2.1 78.3,78.49 76.71,76.9 U$49.P1 | v22.73,76.58 U4.3 | U$74.P1 89.79,63.88 82.42,63.88 | 82.42,63.88 68.45,63.88 | D2.4 52.23,86.02 52.58,86.36 U$43.P1 | U$43.P1 52.58,98.81 | U$43.P1 52.58,102.62 53.21,103.25 66.55,103.25 68.45,101.35 68.45,63.88
  Bottom 0.406: 19.81,73.15 22.73,70.23 22.73,66.42 25.27,63.88 82.42,63.88 | U$49.P1 80.77,73.15 82.42,71.5 82.42,63.88 | v22.73,76.58 22.73,74.68 21.21,73.15 19.81,73.15 | 82.42,63.88 89.79,63.88 U$74.P1 | 19.81,73.15 U$46.P1
GND2  (via drill 0.38)
  Top 0.406: 19.81,123.19 22.73,120.27 22.73,116.46 25.27,113.92 68.45,113.92 | 77.6,123.44 80.52,123.44 82.42,121.54 82.42,113.92 | R6.1 78.3,128.52 76.71,126.94 U$91.P1 | v22.73,126.62 U6.3 | U$115.P1 89.79,113.92 82.42,113.92 | 82.42,113.92 68.45,113.92 | D3.4 52.23,136.05 52.58,136.4 U$85.P1 | U$85.P1 52.58,148.84 | U$85.P1 52.58,152.65 53.21,153.29 66.55,153.29 68.45,151.38 68.45,113.92
  Bottom 0.406: 19.81,123.19 22.73,120.27 22.73,116.46 25.27,113.92 82.42,113.92 | U$91.P1 80.77,123.19 82.42,121.54 82.42,113.92 | v22.73,126.62 22.73,124.71 21.21,123.19 19.81,123.19 | 82.42,113.92 89.79,113.92 U$115.P1 | 19.81,123.19 U$88.P1
GND3  (via drill 0.38)
  Top 0.406: 19.81,173.23 22.73,170.31 22.73,166.5 25.27,163.96 68.45,163.96 | 77.6,173.48 80.52,173.48 82.42,171.58 82.42,163.96 | R14.1 78.3,178.56 76.71,176.97 U$132.P1 | v22.73,176.66 U8.3 | U$156.P1 89.79,163.96 82.42,163.96 | 82.42,163.96 68.45,163.96 | D4.4 52.23,186.09 52.58,186.44 U$126.P1 | U$126.P1 52.58,198.88 | U$126.P1 52.58,202.69 53.21,203.33 66.55,203.33 68.45,201.42 68.45,163.96
  Bottom 0.406: 19.81,173.23 22.73,170.31 22.73,166.5 25.27,163.96 82.42,163.96 | U$132.P1 80.77,173.23 82.42,171.58 82.42,163.96 | v22.73,176.66 22.73,174.75 21.21,173.23 19.81,173.23 | 82.42,163.96 89.79,163.96 U$156.P1 | 19.81,173.23 U$129.P1
GND4  (via drill 0.38)
  Top 0.406: 19.81,223.27 22.73,220.34 22.73,216.53 25.27,214 68.45,214 | 77.6,223.52 80.52,223.52 82.42,221.62 82.42,214 | R18.1 78.3,228.6 76.71,227.01 U$173.P1 | v22.73,226.69 U10.3 | U$197.P1 89.79,214 82.42,214 | 82.42,214 68.45,214 | D5.4 52.23,236.13 52.58,236.47 U$167.P1 | U$167.P1 52.58,248.92 | U$167.P1 52.58,252.73 53.21,253.37 66.55,253.37 68.45,251.46 68.45,214
  Bottom 0.406: 19.81,223.27 22.73,220.34 22.73,216.53 25.27,214 82.42,214 | U$173.P1 80.77,223.27 82.42,221.62 82.42,214 | v22.73,226.69 22.73,224.79 21.21,223.27 19.81,223.27 | 82.42,214 89.79,214 U$197.P1 | 19.81,223.27 U$170.P1
GND5  (via drill 0.38)
  Top 0.406: 19.81,273.3 22.73,270.38 22.73,266.57 25.27,264.03 68.45,264.03 | 77.6,273.56 80.52,273.56 82.42,271.65 82.42,264.03 | R22.1 78.3,278.64 76.71,277.05 U$214.P1 | v22.73,276.73 U12.3 | U$238.P1 89.79,264.03 82.42,264.03 | 82.42,264.03 68.45,264.03 | D6.4 52.23,286.17 52.58,286.51 U$208.P1 | U$208.P1 52.58,298.96 | U$208.P1 52.58,302.77 53.21,303.4 66.55,303.4 68.45,301.5 68.45,264.03
  Bottom 0.406: 19.81,273.3 22.73,270.38 22.73,266.57 25.27,264.03 82.42,264.03 | U$214.P1 80.77,273.3 82.42,271.65 82.42,264.03 | v22.73,276.73 22.73,274.83 21.21,273.3 19.81,273.3 | 82.42,264.03 89.79,264.03 U$238.P1 | 19.81,273.3 U$211.P1
N$1
  Top 0.406: R4.2 55.46,85.89 55.33,86.02 D2.3
N$2
  Top 0.406: R3.2 49.82,87.59 | 49.82,87.59 | D2.1 49.95,87.47 49.82,87.59
N$3  (via drill 0.38)
  Top 0.406: v55.37,83.57 R1.2 | D2.2 55.28,87.47 v55.37,87.38
  Bottom 0.406: v55.37,87.38 v55.37,83.57
N$4
  Top 0.406: R3.1 48.77,84.84 44.32,80.39 U$33.P$2 U$33.P$1
N$5
  Top 0.406: R4.1 59.22,87.59 60.45,86.36 | 60.45,86.36 60.71,86.11 | 60.45,86.36 60.83,85.98 U$44.P$2
  Bottom 0.406: U$44.P$1 U$44.P$2 | U$44.P$2 60.83,76.58 61.47,77.22 61.47,76.84 U$44.P$2
N$6
  Top 0.406: R1.1 51.73,81.88 52.58,81.03 U$45.P$2 U$45.P$1
N$7
  Top 0.406: 22.73,86.74 22.73,89.92 | 22.73,89.92 U$47.P$1 | U4.2 23.68,83.25 22.73,84.2 U$47.P$2 22.73,89.92
N$8  (via drill 0.51)
  Top 0.406: R2.2 85.34,78.49 v85.85,78.99 85.85,79.5 | U1.EMITTER 85.49,80.38 85.85,80.01 85.85,79.76 85.85,79.5 | 85.85,79.5 79.5,79.5 77.98,81.03 77.98,84.45 U$48.P$2 U$48.P$1
  Bottom 0.406: v85.85,78.99 86.11,79.25 86.11,80.14
N$9
  Top 0.406: R12.2 55.46,135.93 55.33,136.05 D3.3
N$10
  Top 0.406: 22.73,36.7 22.73,39.88 | 22.73,39.88 U$23.P$1 | U3.2 23.68,33.21 22.73,34.16 U$23.P$2 22.73,39.88
N$11
  Top 0.406: R9.2 55.46,35.85 55.33,35.98 D1.3
N$12
  Top 0.406: R8.2 49.82,37.55 | 49.82,37.55 | D1.1 49.95,37.43 49.82,37.55
N$13  (via drill 0.38)
  Top 0.406: v55.37,33.53 R10.2 | D1.2 55.28,37.43 v55.37,37.34
  Bottom 0.406: v55.37,37.34 v55.37,33.53
N$14
  Top 0.406: R8.1 48.77,34.8 44.32,30.35 U$10.P$2 U$10.P$1
N$15
  Top 0.406: R9.1 59.22,37.55 60.45,36.32 | 60.45,36.32 60.71,36.07 | 60.45,36.32 60.83,35.94 U$14.P$2
  Bottom 0.406: U$14.P$1 U$14.P$2 | U$14.P$2 60.83,26.54 61.47,27.18 61.47,26.8 U$14.P$2
N$16
  Top 0.406: R10.1 51.73,31.84 52.58,30.99 U$15.P$2 U$15.P$1
N$17
  Top 0.406: R7.2 49.82,137.63 | 49.82,137.63 | D3.1 49.95,137.5 49.82,137.63
N$18  (via drill 0.51)
  Top 0.406: R11.2 85.34,28.45 v85.85,28.96 85.85,29.46 | U2.EMITTER 85.49,30.34 85.85,29.97 85.85,29.72 85.85,29.46 | 85.85,29.46 79.5,29.46 77.98,30.99 77.98,34.42 U$24.P$2 U$24.P$1
  Bottom 0.406: v85.85,28.96 86.11,29.21 86.11,30.1
N$19  (via drill 0.38)
  Top 0.406: v55.37,133.6 R5.2 | D3.2 55.28,137.5 v55.37,137.41
  Bottom 0.406: v55.37,137.41 v55.37,133.6
N$20
  Top 0.406: R7.1 48.77,134.87 44.32,130.43 U$83.P$2 U$83.P$1
N$21
  Top 0.406: R12.1 59.22,137.63 60.45,136.4 | 60.45,136.4 60.71,136.14 | 60.45,136.4 60.83,136.02 U$86.P$2
  Bottom 0.406: U$86.P$1 U$86.P$2 | U$86.P$2 60.83,126.62 61.47,127.25 61.47,126.87 U$86.P$2
N$22
  Top 0.406: R5.1 51.73,131.91 52.58,131.06 U$87.P$2 U$87.P$1
N$23
  Top 0.406: 22.73,136.78 22.73,139.95 | 22.73,139.95 U$89.P$1 | U6.2 23.68,133.29 22.73,134.24 U$89.P$2 22.73,139.95
N$24  (via drill 0.51)
  Top 0.406: R6.2 85.34,128.52 v85.85,129.03 85.85,129.54 | U5.EMITTER 85.49,130.41 85.85,130.05 85.85,129.79 85.85,129.54 | 85.85,129.54 79.5,129.54 77.98,131.06 77.98,134.49 U$90.P$2 U$90.P$1
  Bottom 0.406: v85.85,129.03 86.11,129.29 86.11,130.17
N$25
  Top 0.406: R16.2 55.46,185.97 55.33,186.09 D4.3
N$26
  Top 0.406: R15.2 49.82,187.67 | 49.82,187.67 | D4.1 49.95,187.54 49.82,187.67
N$27  (via drill 0.38)
  Top 0.406: v55.37,183.64 R13.2 | D4.2 55.28,187.54 v55.37,187.45
  Bottom 0.406: v55.37,187.45 v55.37,183.64
N$28
  Top 0.406: R15.1 48.77,184.91 44.32,180.47 U$124.P$2 U$124.P$1
N$29
  Top 0.406: R16.1 59.22,187.67 60.45,186.44 | 60.45,186.44 60.71,186.18 | 60.45,186.44 60.83,186.06 U$127.P$2
  Bottom 0.406: U$127.P$1 U$127.P$2 | U$127.P$2 60.83,176.66 61.47,177.29 61.47,176.91 U$127.P$2
N$30
  Top 0.406: R13.1 51.73,181.95 52.58,181.1 U$128.P$2 U$128.P$1
N$31
  Top 0.406: 22.73,186.82 22.73,189.99 | 22.73,189.99 U$130.P$1 | U8.2 23.68,183.33 22.73,184.28 U$130.P$2 22.73,189.99
N$32  (via drill 0.51)
  Top 0.406: R14.2 85.34,178.56 v85.85,179.07 85.85,179.58 | U7.EMITTER 85.49,180.45 85.85,180.09 85.85,179.83 85.85,179.58 | 85.85,179.58 79.5,179.58 77.98,181.1 77.98,184.53 U$131.P$2 U$131.P$1
  Bottom 0.406: v85.85,179.07 86.11,179.32 86.11,180.21
N$33
  Top 0.406: R20.2 55.46,236 55.33,236.13 D5.3
N$34
  Top 0.406: R19.2 49.82,237.71 | 49.82,237.71 | D5.1 49.95,237.58 49.82,237.71
N$35  (via drill 0.38)
  Top 0.406: v55.37,233.68 R17.2 | D5.2 55.28,237.58 v55.37,237.49
  Bottom 0.406: v55.37,237.49 v55.37,233.68
N$36
  Top 0.406: R19.1 48.77,234.95 44.32,230.5 U$165.P$2 U$165.P$1
N$37
  Top 0.406: R20.1 59.22,237.71 60.45,236.47 | 60.45,236.47 60.71,236.22 | 60.45,236.47 60.83,236.09 U$168.P$2
  Bottom 0.406: U$168.P$1 U$168.P$2 | U$168.P$2 60.83,226.69 61.47,227.33 61.47,226.95 U$168.P$2
N$38
  Top 0.406: R17.1 51.73,231.99 52.58,231.14 U$169.P$2 U$169.P$1
N$39
  Top 0.406: 22.73,236.86 22.73,240.03 | 22.73,240.03 U$171.P$1 | U10.2 23.68,233.37 22.73,234.31 U$171.P$2 22.73,240.03
N$40  (via drill 0.51)
  Top 0.406: R18.2 85.34,228.6 v85.85,229.11 85.85,229.62 | U9.EMITTER 85.49,230.49 85.85,230.12 85.85,229.87 85.85,229.62 | 85.85,229.62 79.5,229.62 77.98,231.14 77.98,234.57 U$172.P$2 U$172.P$1
  Bottom 0.406: v85.85,229.11 86.11,229.36 86.11,230.25
N$41
  Top 0.406: R24.2 55.46,286.04 55.33,286.17 D6.3
N$42
  Top 0.406: R23.2 49.82,287.74 | 49.82,287.74 | D6.1 49.95,287.62 49.82,287.74
N$43  (via drill 0.38)
  Top 0.406: v55.37,283.72 R21.2 | D6.2 55.28,287.62 v55.37,287.53
  Bottom 0.406: v55.37,287.53 v55.37,283.72
N$44
  Top 0.406: R23.1 48.77,284.99 44.32,280.54 U$206.P$2 U$206.P$1
N$45
  Top 0.406: R24.1 59.22,287.74 60.45,286.51 | 60.45,286.51 60.71,286.26 | 60.45,286.51 60.83,286.13 U$209.P$2
  Bottom 0.406: U$209.P$1 U$209.P$2 | U$209.P$2 60.83,276.73 61.47,277.37 61.47,276.99 U$209.P$2
N$46
  Top 0.406: R21.1 51.73,282.03 52.58,281.18 U$210.P$2 U$210.P$1
N$47
  Top 0.406: 22.73,286.89 22.73,290.07 | 22.73,290.07 U$212.P$1 | U12.2 23.68,283.4 22.73,284.35 U$212.P$2 22.73,290.07
N$48  (via drill 0.51)
  Top 0.406: R22.2 85.34,278.64 v85.85,279.15 85.85,279.65 | U11.EMITTER 85.49,280.53 85.85,280.16 85.85,279.91 85.85,279.65 | 85.85,279.65 79.5,279.65 77.98,281.18 77.98,284.61 U$213.P$2 U$213.P$1
  Bottom 0.406: v85.85,279.15 86.11,279.4 86.11,280.29

## Text on the board
Bottom: v10 | v10 | v10 | v10 | v10 | v10
Dimension: route out | route out | route out | route out | route out | route out | route out | route out | route out | route out | route out | route out | route out | route out | route out | route out | route out | route out | route out | route out | route out | route out | route out | route out | route out | route out | route out | route out | route out | route out | route out | route out | route out | route out | route out | route out | route out | route out | route out | route out | route out | route out | route out | route out | route out | route out | route out | route out | route out | route out | route out | route out | route out | route out | route out | route out | route out | route out | route out | route out | route out | route out | route out | route out | route out | route out | route out | route out | route out | route out | route out | route out | route out | route out | route out | route out | route out | route out | route out | route out | route out | route out | route out | route out | route out | route out | route out | route out | route out | route out | route out | route out | route out | route out | route out | route out | route out | route out | route out | route out | route out | route out | route out | route out | route out | route out | route out | route out | route out | route out | route out | route out | route out | route out | route out | route out | route out | route out | route out | route out | route out | route out | route out | route out | route out | route out | route out | route out | route out | route out | route out | route out | route out | route out | route out | route out | route out | route out | route out | route out | route out | route out | route out | route out